# Altium PCB FMP_Proto_4.0.PcbDoc
Units mm, origin at the board's own origin, x right, y up, seen from the top; angles counter-clockwise.
Board outline 104.5 x 77.2 mm, 2 copper layers (Top Layer, Bottom Layer); 31 components, 19 nets, 114 pads, 0 vias.
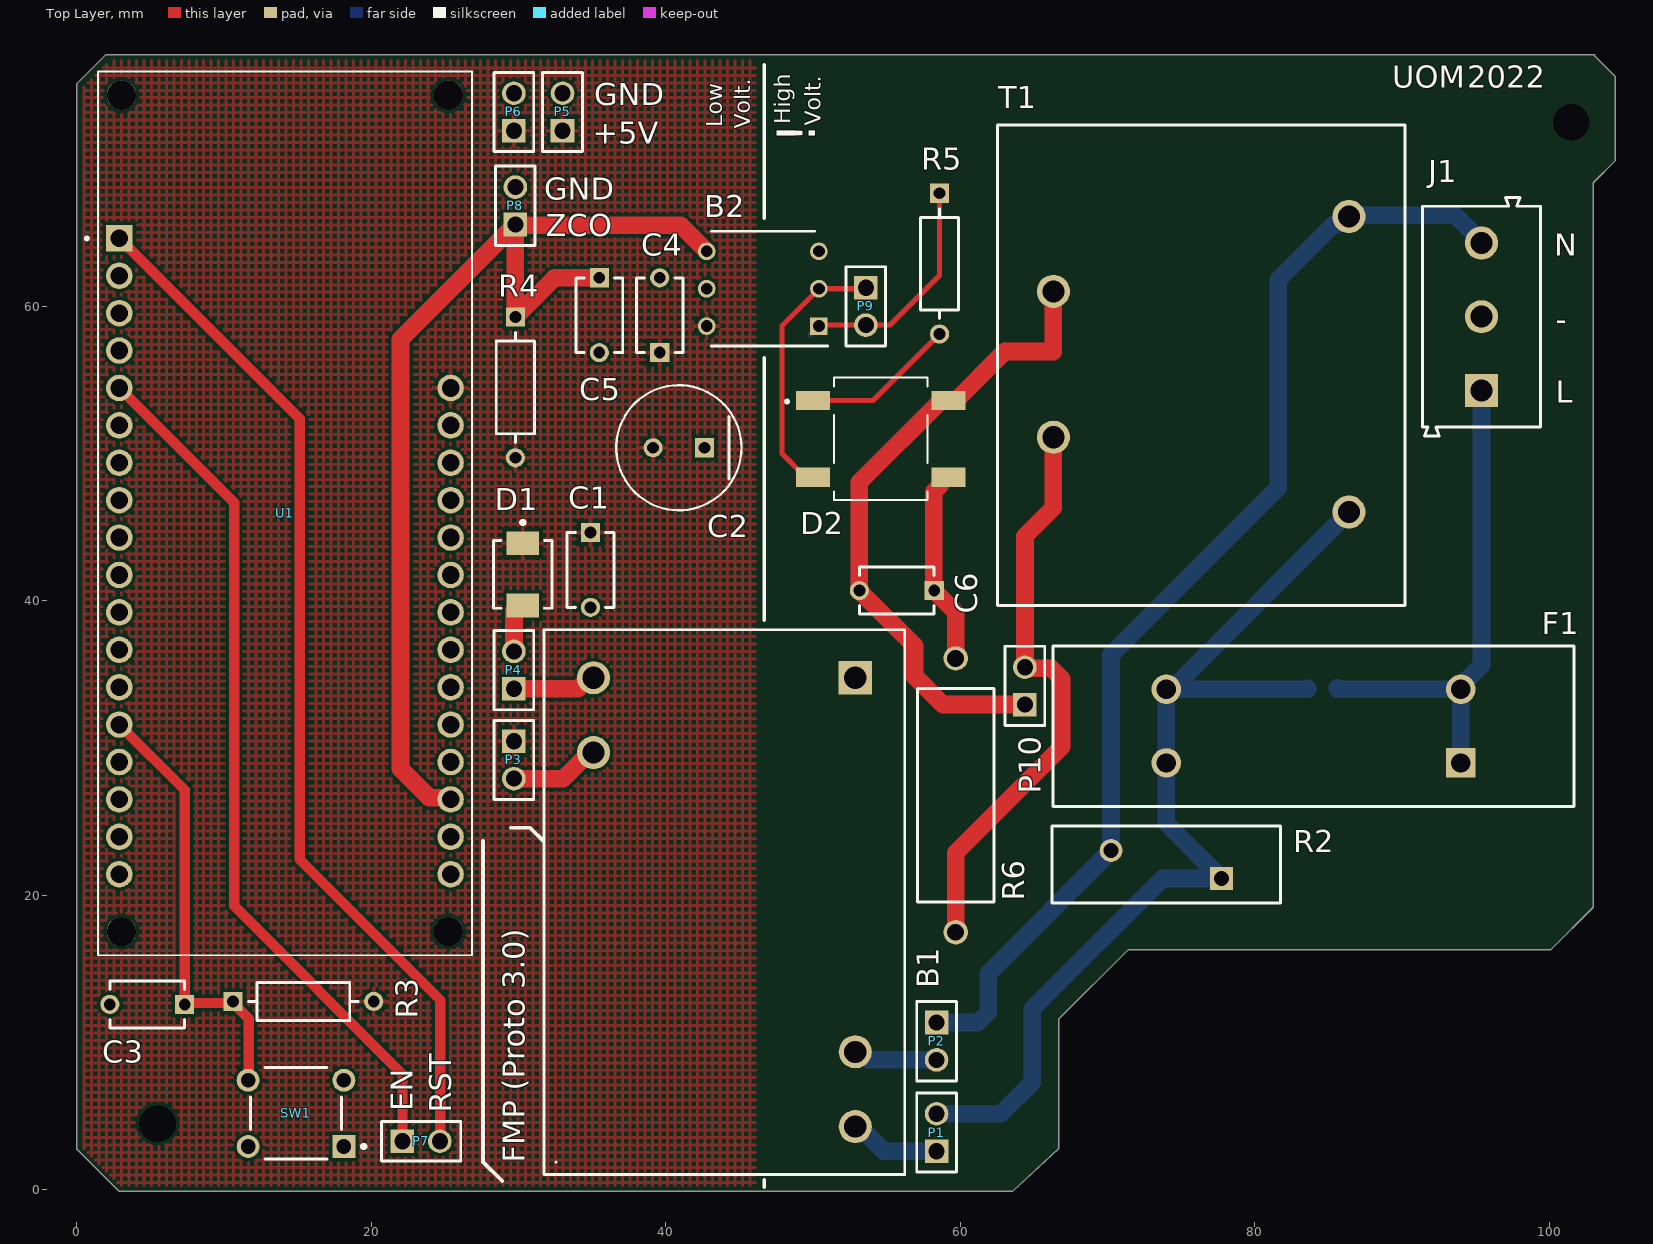
[diagram p0: Top Layer view]
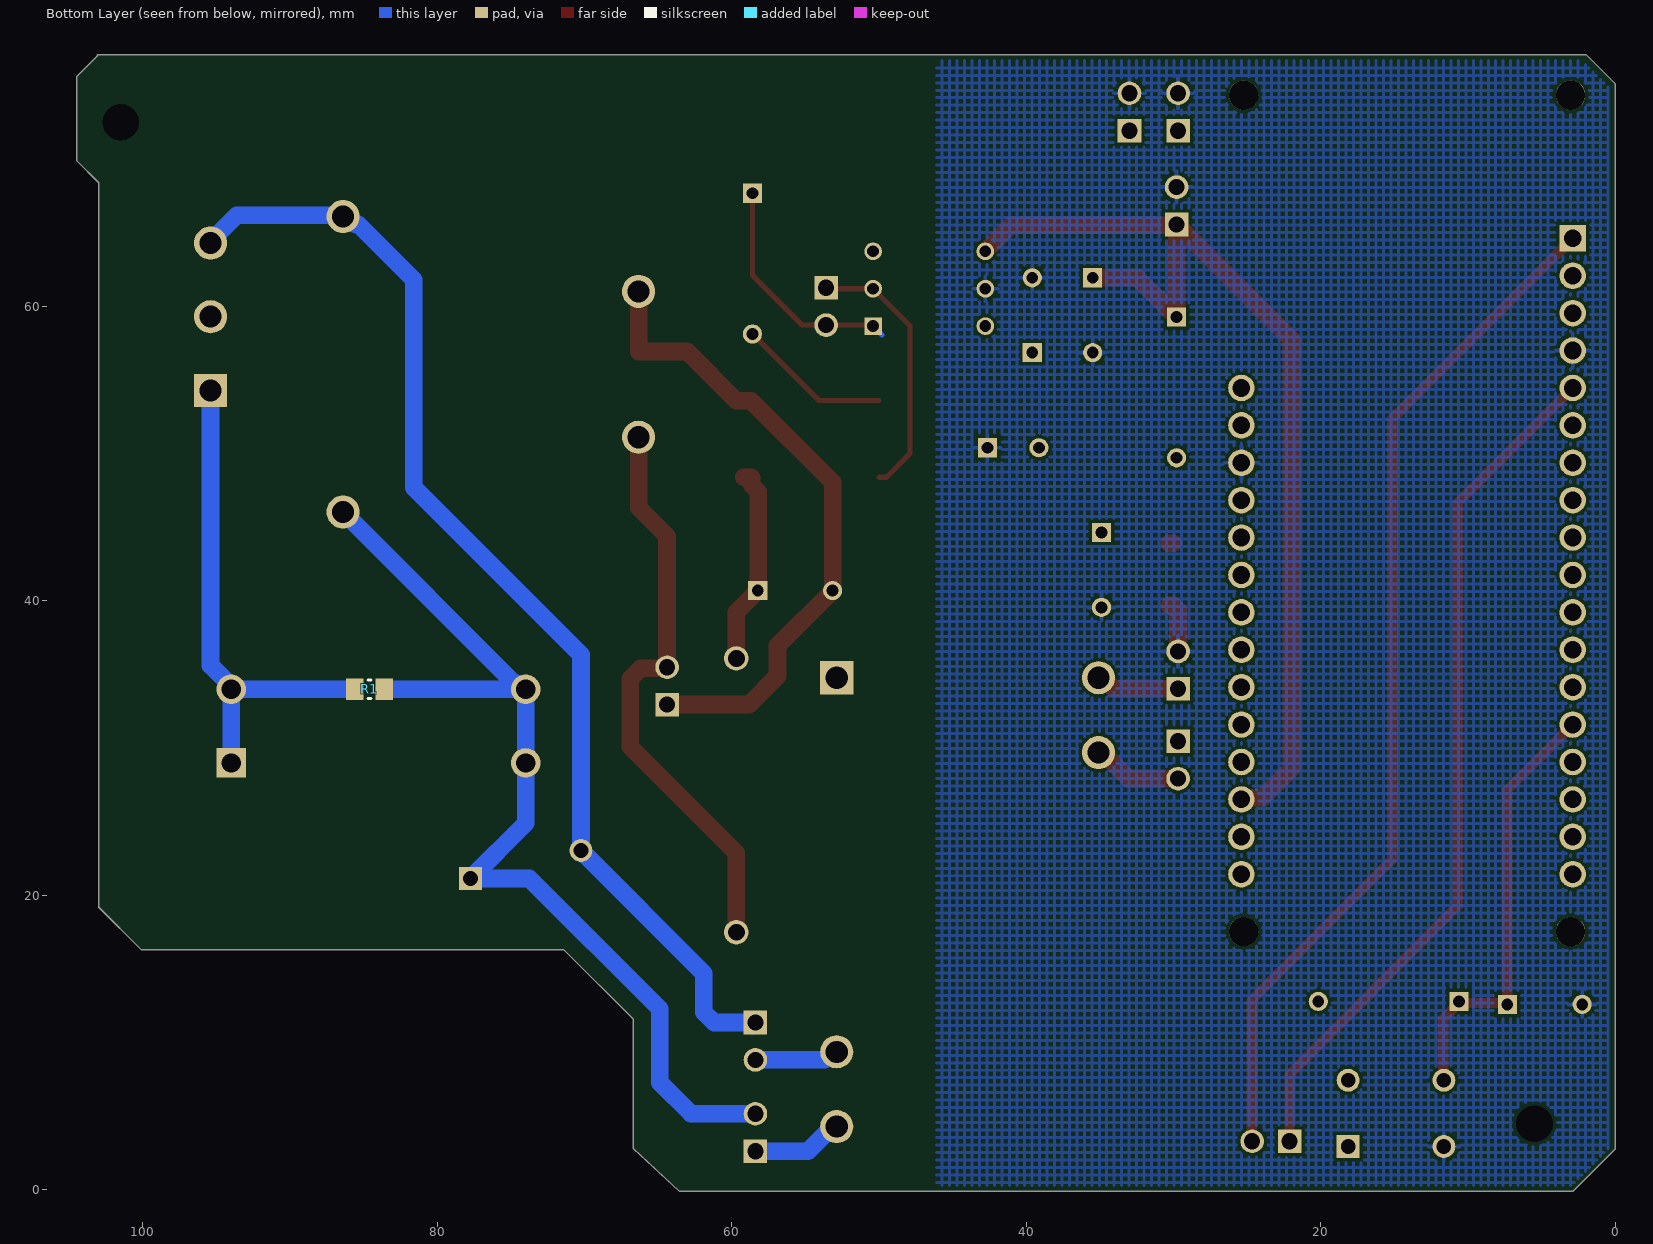
[diagram p1: Bottom Layer view, seen from below]
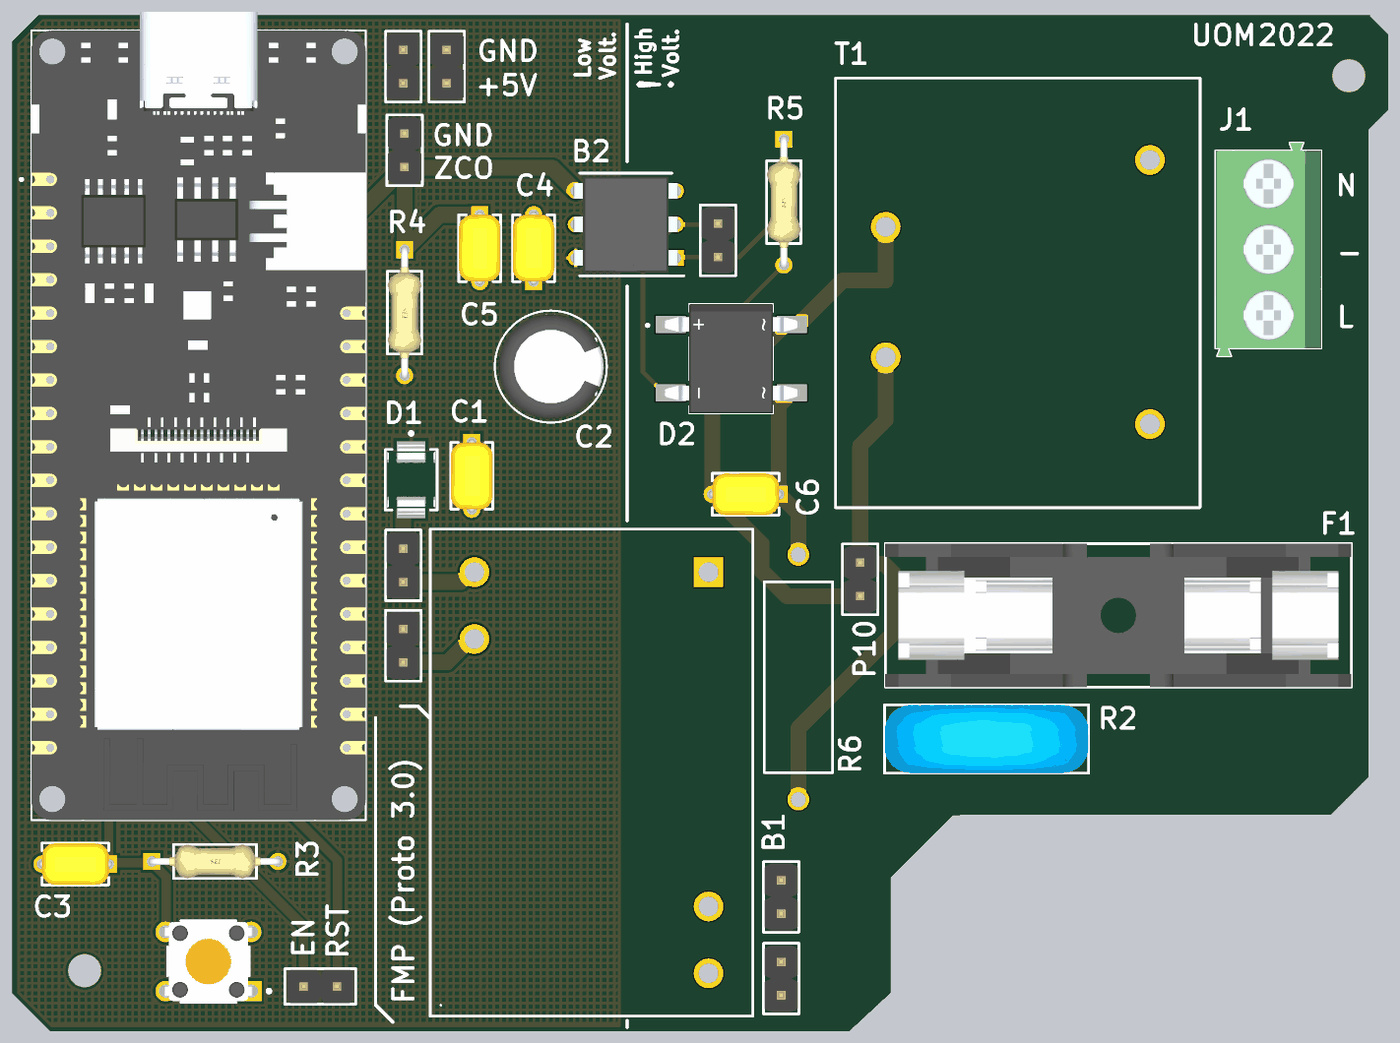
[diagram p2: 3D render of the assembled board from above, using the file's embedded part models]

## Layer stack, top to bottom
Top Solder: solder mask 0.0102, Solder Resist, Dk 3.5
Top Layer: signal copper 0.0356
Dielectric 1: dielectric 0.32, FR-4, Dk 4.8
Bottom Layer: signal copper 0.0356
Bottom Solder: solder mask 0.0102, Solder Resist, Dk 3.5

## Board outline
103,19.2 100.1,16.3 71.4,16.3 66.7,11.6 66.7,2.821 63.554,-0.1 2.9,-0.1 0,2.8 0,75.1 2,77.1 103.1,77.1 103.1,77 104.5,75.6 104.5,69.9 103,68.4

## Design rules (kind name [scope] priority, off if disabled: settings)
Clearance [All] p1: gap=0.2 ignorepadtopadclearanceinfootprint=FALSE
ComponentClearance [All] p1: gap=0.254 collisioncheckmode=3 verticalgap=0.2 showdistances=FALSE
HoleSize [All] p1: absolutevalues=TRUE maxlimit=3 minlimit=0.25 maxpercent=80.000 minpercent=20.000
HoleToHoleClearance [All] p1: gap=0.2 allowstackedmicrovias=TRUE
PolygonConnect [All] p1: connectstyle=Relief reliefconductorwidth=0.254 reliefentries=4 polygonreliefangle="90 Angle" airgapwidth=0.254
RoomDefinition FMP_Proto_4.0 [InComponentClass('FMP_Proto_4.0')] p1: confinementstyle=ConfineOut formatcopy=TRUE lockcomponents=FALSE outline 133.2,1 150.4,1 150.4,11.7 133.2,11.7
RoutingVias [All] p1: holewidth=0.711 width=1.5 viastyle="Through Hole" minholewidth=0.711 minwidth=1.5 maxholewidth=0.711 maxwidth=1.5
SilkToSilkClearance [All] p1: silktosilkclearance=0.2
SilkToSolderMaskClearance [IsPad] p1: minsilkscreentomaskgap=0.2 clearancetoexposedcopper=TRUE
SolderMaskExpansion [All] p1: expansion=0.102 istentingtop=FALSE
UnRoutedNet [All] p1: checkbadconnections=TRUE
Width [All] p1: maxlimit=1.2 minlimit=0.2 preferedwidth=0.35 minimp=50.000000 maximp=50.000000 favimp=50.000000
24 further rules are at their usual default settings.

## Components (designator, comment, footprint, x,y, rotation, side; value= is the part's Value field where it differs from the comment)
B1 "MP-LDE03-20B05" MPLDE0320B05 55.42,1.76 r90 top
B2 "VOH1016AD" DIP762W60P254L730H450Q6N 46.6,61.2 r180 top
C1 "1uF" FP-C322C104K5R5TA-MFG 34.9,42.1 r270 top
C2 "150uF" FP-EEU-FR1H101B-MFG 40.9,50.4 r180 top
C3 "0.1uF" FP-C322C104K5R5TA-MFG 4.8,12.6 r180 top
C4 "0.1uF" FP-C322C104K5R5TA-MFG 39.6,59.4 r90 top
C5 "10nF" FP-C322C104K5R5TA-MFG 35.5,59.4 r270 top
C6 "22nF" FP-C322C104K5R5TA-MFG 55.7,40.7 r180 top
D1 "SMBJ5.0A-TR" FP-SMB-MFG 30.3,41.8 r270 top
D2 "DBLS106G" DIOB_DBLS106G 54.6,51 r0 top
F1 "1A/250V" FP-0031_8231-MFG 84,31.5 r180 top
J1 "" 691111710003 95.4,59.3 r90 top
P1 "Jumper" 61300211121 58.4,3.9 r90 top
P2 "Jumper" 61300211121 58.4,10.1 r270 top
P3 "Jumper" 61300211121 29.7,29.2 r270 top
P4 "Jumper" 61300211121 29.7,35.3 r90 top
P5 "EXT_ISO-PWR" 61300211121 33,73.2 r90 top
P6 "TP1" 61300211121 29.7,73.2 r90 top
P7 "" 61300211121 23.4,3.3 r0 top
P8 "TP2" 61300211121 29.8,66.83 r90 top
P9 "TP3" 61300211121 53.6,60 r270 top
P10 "TP4" 61300211121 64.4,34.23 r90 top
R1 "Optional bypass" RESC2013X60X35ML10T20 84.6,34 r180 bottom
R2 "S14K350" FP-B72214S0301K101-0 74,22.1 r180 top
R3 "10K" FP-CF14-MFG 15.4,12.8 r0 top
R4 "270R" FP-CF14-MFG 29.8,54.5 r270 top
R5 "400R" FP-CF14-MFG 58.6,62.9 r270 top
R6 "300R" RESA90-1450X520 59.7,26.8 r90 top
SW1 "" FP-B3F-1005-MFG 14.9,5.2 r0 top
T1 "MYRRA-44121" MYRRA-44121 86.4,46.034 r90 top
U1 "DFR0654" MODULE_DFR0654 14.15,45.94 r0 top

## Footprints (in the part's own frame and the unit in brackets; to place one, negate y for a bottom-side part, rotate by r counter-clockwise, add the part's x,y. Pads: shape width x height; smd on the part's side, far side on the other; paste and mask are expansions set on the pad)
61300211121 [mm] "Pin Header, pitch 2.54 mm, THT, Vertical, single row, 2p"
  rect 1.6x1.6 hole 1.1: 1(-1.27,0)
  round 1.6 hole 1.1: 2(1.27,0)
  silkscreen extent -2.69,-1.35 2.69,1.35, body extent -2.54,-1.27 2.54,1.27, height 8.57
691111710003 [mm] "5,00mm - modular - green - Horizontal entry with pressure clamp - 10,0mm height - 03p"
  rect 2.25x2.25 hole 1.5: 1(-5,0)
  round 2.25 hole 1.5: 2(0,0) 3(5,0)
  silkscreen extent -8.1,-4 8.1,4, body extent -8.1,-4 8.1,4, height 11.05
DIOB_DBLS106G [mm]
  rect 2.3x1.3 smd: AC1(4.6,2.6) AC2(4.6,-2.6) NEG(-4.6,-2.6) POS(-4.6,2.6)
  silkscreen extent -6.45,-4.16 3.17,4.16, body extent -5.02,-4.16 5.02,4.16, height 2.93
DIP762W60P254L730H450Q6N [mm]
  rect 1.2x1.2 / inner round 1.2 / far side rect 1.2x1.2 hole 0.8: 1(-3.81,2.54)
  round 1.2 hole 0.8: 2(-3.81,0) 3(-3.81,-2.54) 4(3.81,-2.54) 5(3.81,0) 6(3.81,2.54)
  silkscreen extent -4.41,-3.9 3.5,3.9, body extent -3.96,-3.65 3.96,3.65, height 4.5
FP-0031_8231-MFG [mm]
  round 2 hole 1.3 paste-1000 mask+0: 1(-10,-2.5) 2(10,-2.5) 2(10,2.5)
  rect 2x2 hole 1.3 paste-1000 mask+0: 1(-10,2.5)
  silkscreen extent -17.7,-5.45 17.7,5.45, body extent -17.8,-5.55 17.8,5.55, height 0.25
FP-B3F-1005-MFG [mm]
  rect 1.55x1.55 hole 1 paste-1000 mask+0: 1(3.25,-2.25)
  round 1.55 hole 1 paste-1000 mask+0: 2(-3.25,-2.25) 3(3.25,2.25) 4(-3.25,2.25)
  silkscreen extent -3.1,-3.1 4.73,3.1, body extent -4.13,-3.2 4.13,3.2, height 0.25
FP-B72214S0301K101-0 [mm]
  rect 1.55x1.55 hole 1 paste-1000 mask+0: 1(-3.75,0.95)
  round 1.55 hole 1 paste-1000 mask+0: 2(3.75,-0.95)
  silkscreen extent -7.75,-2.6 7.75,2.6, body extent -7.85,-2.7 7.85,2.7, height 0.25
FP-C322C104K5R5TA-MFG [mm]
  rect 1.3x1.3 hole 0.8 paste-1000 mask+0: 1(-2.54,0)
  round 1.3 hole 0.8 paste-1000 mask+0: 2(2.54,0)
  silkscreen extent -2.54,-1.59 2.54,1.59, body extent -3.29,-1.69 3.29,1.69, height 0.25
FP-CF14-MFG [mm]
  rect 1.3x1.3 hole 0.8 paste-1000 mask+0: 1(-4.78,0)
  round 1.3 hole 0.8 paste-1000 mask+0: 2(4.78,0)
  silkscreen extent -3.73,-1.3 3.73,1.3, body extent -5.53,-1.4 5.53,1.4, height 0.25
FP-EEU-FR1H101B-MFG [mm]
  rect 1.3x1.3 hole 0.8 paste-1000 mask+0: 1(-1.75,0)
  round 1.3 hole 0.8 paste-1000 mask+0: 2(1.75,0)
  silkscreen extent -4.25,-4.25 4.25,4.25, body extent -4.35,-4.35 4.35,4.35, height 0.25
FP-SMB-MFG [mm]
  rect 1.62x2.18 smd paste+0 mask+0: 1(-2.11,0) 2(2.11,0)
  silkscreen extent -3.65,-1.97 2.3,1.97, body extent -3.02,-2.07 3.02,2.07, height 0.25
MODULE_DFR0654 [mm]
  rect 1.8x1.8 hole 1.2: 1(-11.25,18.68)
  round 1.8 hole 1.2: 2(-11.25,16.14) 3(-11.25,13.6) 4(-11.25,11.06) 5(-11.25,8.52) 6(-11.25,5.98) 7(-11.25,3.44) 8(-11.25,0.9) 9(-11.25,-1.64) 10(-11.25,-4.18) 11(-11.25,-6.72) 12(-11.25,-9.26) 13(-11.25,-11.8) 14(-11.25,-14.34) 15(-11.25,-16.88) 16(-11.25,-19.42) 17(-11.25,-21.96) 18(-11.25,-24.5) 19(11.25,-24.5) 20(11.25,-21.96) 21(11.25,-19.42) 22(11.25,-16.88) 23(11.25,-14.34) 24(11.25,-11.8) 25(11.25,-9.26) 26(11.25,-6.72) 27(11.25,-4.18) 28(11.25,-1.64) 29(11.25,0.9) 30(11.25,3.44) 31(11.25,5.98) 32(11.25,8.52)
  round 2 hole 2 unplated: ""(-11.1,-28.4) ""(-11.1,28.4) ""(11.1,-28.4) ""(11.1,28.4)
  silkscreen extent -13.55,-30 12.7,30, body extent -12.7,-30 12.7,31.4, height 7.1
MPLDE0320B05 [mm]
  round 2.25 hole 1.5: 1(2.54,2.54) 2(7.62,2.54) 3(33.02,20.32) 4(27.94,20.32)
  rect 2.25x2.25 hole 1.5: 5(33.02,2.54)
  silkscreen extent -0.72,-0.82 36.28,23.68, body extent -0.72,-0.82 36.28,23.68, height 18
MYRRA-44121 [mm]
  round 2.25 hole 1.5: 1(0,0) 2(20.066,0) 3(14.986,20.066) 4(5.08,20.066)
  silkscreen extent -6.35,-3.81 26.29,23.88, body extent -6.35,-3.81 26.29,23.88, height 23.5
RESA90-1450X520 [mm] "THD, 2-Leads, Dia 5.2mm, Body Length 14.5mm"
  round 1.65 hole 1.15: 1(-9.3,0) 2(9.3,0)
  silkscreen extent -7.25,-2.6 7.25,2.6, body extent -7.25,-2.6 7.25,2.6, height 5.2
RESC2013X60X35ML10T20 [mm] "Chip Resistor, 2-Leads, Body 2.1x1.35mm, IPC Low Density"
  rect 1.2x1.45 smd: 1(-1,0) 2(1,0)
  silkscreen extent -0.1,-0.63 0.1,0.63, body extent -1.05,-0.68 1.05,0.67, height 0.6

## Part data
B1: "This is a MP-LDE03-20B05 AC/DC PCB Mount Power Supply (PSU)", Manufacturer_Name=MULTICOMP, Manufacturer_Part_Number=MP-LDE06-20B24, Datasheet Link=https://www.farnell.com/datasheets/3155173.pdf, Geometry.Height=15.86mm
B2: "High Speed Optocouplers 1MBps Schmitt-Trigr DIP-6", Manufacturer_Name=Vishay, Mouser Part Number=78-VOH1016AD, Datasheet Link=http://www.vishay.com/docs/84896/voh1016ab.pdf, Geometry.Height=4.5mm, Manufacturer_Part_Number=VOH1016AD, Mouser Price/Stock=https://www.mouser.co.uk/ProductDetail/Vishay-Semiconductors/VOH1016AD?qs=PqoDHHvF648sjq9xbZMnUg%3D%3D
C1 C3 C4 C5 C6: library part CMP-03020-034661-1, "CAP CER 0.1UF 50V X7R RADIAL", Capacitance=100nF, Case/Package=Radial, Dielectric=X7R, Dielectric Material=Ceramic, Max Operating Temperature=125°C, Min Operating Temperature=-55°C, Package Quantity=500, Tolerance=10%, Voltage=50V, Construction=RADIAL, Depth=3.18mm, Dissipation Factor=2.5%, Height=3.18mm, Height - Seated (Max)=0.26inch, Lead Diameter=0.51mm, Lead Free="Lead Free", Lead Length=7mm, Lead Pitch=5.08mm, Lead/Base Style="Formed Leads", Length=5.08mm, Material=Ceramic, Mount="Through Hole", Number of Pins=2, Packaging=Bulk, Radiation Hardening=No, REACH SVHC="No SVHC", RoHS Compliant=Yes, Series="Golden Max™", Termination=Radial, Voltage Rating=50V, Voltage Rating (DC)=50V, Weight=0.0625lb, Width=0.125inch
C2: library part CMP-05427-000020-1, "CAP ALUM 100UF 20% 50V RADIAL", Capacitance=100uF, Case/Package=Radial, ESR (Equivalent Series Resistance)=61mR, Max Operating Temperature=105°C, Min Operating Temperature=-40°C, Package Quantity=1, Ripple Current=870mA, Tolerance=20%, Voltage Rating=50V, Contact Plating=Tin, Diameter=8mm, Features="General Purpose", Height=11.5mm, Height - Seated (Max)=0.512inch, Impedance=61mR, Lead Diameter=0.6mm, Lead Free="Lead Free", Lead Pitch=5mm, Length=11.5mm, Life (Hours)=6000Hour, Mount="Through Hole", Packaging="Tape and Reel", Radiation Hardening=No, REACH SVHC="No SVHC", RoHS Compliant=Yes, Series=FR, Termination=Radial, Voltage Rating (DC)=50V
D1: library part CMP-12225-000019-1, "TVS DIODE 5V 13.4V SMB", Breakdown Voltage=6.4V, Clamping Voltage=14.4V, Manufacturer=STMicroelectronics, Max Junction Temp=+150°C, Package=SMB, Peak Pulse Current=275A, Peak Pulse Power=600W, Reverse Standoff Voltage=5V, Temperature="-55°C to +150°C", Temperature Range Low=-55°C, Automotive=No, Category=Diode, ComponentLink2Description=Datasheet, ComponentLink2URL=https://www.st.com/resource/en/datasheet/smbj.pdf, Device Class L1="Circuit Protection", Device Class L2="TVS Diodes", Device Class L3=unset, Digikey Description="TVS DIODE 5V 13.4V SMB", Direction=Unidirectional, Height=2.65mm, Lead Free=Yes, Manufacturer Part Number=SMBJ5.0A-TR, Mouser Description="SMBJ Series 600 W 5 V Uni Directional SMT TVS Diode - DO-214AA", Number Of Channels=1, Octopart=https://octopart.com/smbj5.0a-tr-stmicroelectronics-347079, RoHS=TRUE, Standoff Height=0.05mm, Temperature Range High=+150°C
D2: "1A, 800V, Standard Bridge Rectifier", Package="DBLS Taiwan Semiconductor", Availability="In Stock", Check_prices=https://www.snapeda.com/parts/DBLS106G/Taiwan+Semiconductor/view-part/?ref=eda, MF="Taiwan Semiconductor", MP=DBLS106G, Price=None, Purchase-URL=https://pricing.snapeda.com/search/part/DBLS106G/?ref=eda, SnapEDA_Link=https://www.snapeda.com/parts/DBLS106G/Taiwan+Semiconductor/view-part/?ref=snap
F1: library part CMP-26292-000005-1, "FUSE BLOK CARTRIDGE 600V 16A PCB", Ambient Temperature Range High=+85°C, Ambient Temperature Range Low=-40°C, Fuse Current=16A, Manufacturer=Schurter, Manufacturer Part Number=0031.8231, Package=0, Voltage Rating Ac=500V, Voltage Rating Dc=600V, Automotive=No, Category=Fuse, ComponentLink2Description=Datasheet, ComponentLink2URL=https://www.schurter.com/en/datasheet/typ_OGD.pdf, Conn Orientation=Horizontal, Device Class L1="Circuit Protection", Device Class L2="Fuse Holders", Device Class L3=unset, Digikey Description="FUSE BLOK CARTRIDGE 600V 16A PCB", Height=12.7mm, Lead Free=Yes, Mouser Description="Fuse Holder OGD FUSEHOLDER 5X20/6.3X32", Number Of Fuses=1, Octopart=https://octopart.com/0031.8231-schurter-8659, RoHS=TRUE, Standoff Height=0.7mm
J1: library part CMP-1502-03263-1, "Series 111 - 5.00 mm Horizontal Entry Modular with Pressure Clamp WR-TBL, 3 pin", Manufacturer="Wurth Elektronik", Operating Temperature=-40to105degC, Package Reference=691111710003, Datasheet URL=http://katalog.we-online.de/em/datasheet/6911117100xx.pdf, Manufacturer URL=http://www.we-online.de, Mounting Technology=THT, Packaging=Box, Part Number=691111710003, Pin Number=3, Pitch=5.00mm, Publisher=WurthElektronik
P1 P2 P3 P4 P5 P6 P7 P8 P9 P10: library part CMP-1712-00002-4, "THT Vertical Pin Header WR-PHD, Pitch 2.54 mm, Single Row, 2 pins", Contact Resistance=20mOhm, Manufacturer="Wurth Elektronik", Operating Temperature=-40to105degC, Package Reference=61300211121, Rated Current=3A, Withstanding Voltage=500VAC, Working Voltage=250VAC, Datasheet URL=https://katalog.we-online.de/em/datasheet/6130xx11121.pdf, Gender=Male, Manufacturer URL=http://www.we-online.de, Mounting Technology=THT, Orientation=Vertical, Packaging=Bag, Part Number=61300211121, Pin Number=2, Pitch=2.54mm, Publisher=WurthElektronik, Row Number=Single
R1: library part CMP-2100-03673-1, "Chip Resistor, 0 Ohm, Jumper", Case Code (Imperial)=0805, Case Code (Metric)=2012, Manufacturer=Yageo, Max Operating Temperature=155degC, Min Operating Temperature=-55degC, Package Description="2-Pin Surface Mounted Device, Body 2 x 1.25 mm", Power Rating=125mW, Resistance=0mOhm, Temperature Coefficient=200ppm/degreesC, Tolerance=5%, Voltage Rating=150V, Case/Package=0805, Composition=ThickFilm, Contact Plating=Tin, Datasheet URL=http://www.yageo.com/NewPortal/yageodocoutput?fileName=/pdf/R-Chip/PYu-RC_Group_51_RoHS_L_5.pdf, Datasheet Version="Rev. 5, 10/2016", Depth=1.25mm, Height=0.5mm, Lead Free=LeadFree, Length=2mm, Manufacturer URL=http://www.yageo.com/, Military Standard=Not, Number of Pins=2, Package Reference=0805, Packaging=TapeandReel, Radiation Hardening=No, REACH SVHC=Unknown, RoHSCompliant=true, Termination=SMD/SMT, Voltage Rating (DC)=150V, Width=1.25mm
R2: library part CMP-10618-000016-1, "VARISTOR 560V 50A DISC 14MM", Capacitance=300pF, Clamping Current=50A, Clamping Voltage=775V, Max Operating Temperature=85°C, Max Surge Current=4.5kA, Max Voltage Rating (AC)=300V, Max Voltage Rating (DC)=385V, Min Operating Temperature=-40°C, Package Quantity=500, Tolerance=10%, Varistor Voltage=470V, Depth=5.2mm, Diameter=14mm, Energy=76J, Lead Length=30mm, Lead Pitch=7.5mm, Lead/Base Style=Radial, Mount=Radial, Packaging=Bulk, REACH SVHC="No SVHC", RoHS Compliant=Yes, Series=StandardD, Thickness=5.2mm, Voltage Rating (AC)=300V, Voltage Rating (DC)=385V, Voltage Tolerance=10%, Weight=0.141096oz
R3 R4 R5: library part CMP-26528-000003-1, "RES 7.5K OHM 1/4W 5% AXIAL", Case/Package=Axial, Max Operating Temperature=155°C, Max Power Dissipation=250mW, Min Operating Temperature=-55°C, Resistance=7.5kR, Resistor Type="Carbon Film", Temperature Coefficient=-400ppm/°C, Tolerance=5%, Contact Plating=Tin, Diameter=2.3mm, Features="Flame Retardant Coating", Lead Free="Lead Free", Length=0.256inch, Mount="Through Hole", Number of Terminations=2, Packaging="Tape and Reel", Power Rating=250mW, Radiation Hardening=No, RoHS Compliant=Yes, Series=CF
R6: library part CMP-1678-00001-6, "Axial Resistor, power metal; THT; 1,5kΩ; 2W; ±5%; Ø4x11mm; 350ppm/°C", Manufacturer=Ohmite, Max Operating Temperature="275 degC", Min Operating Temperature="-55 degC", Package Quantity=10, Voltage Rating="100 mV", ComponentLink1Description="Manufacturer URL", ComponentLink1URL=http://www.ohmite.com/, ComponentLink2Description=Datasheet, ComponentLink2URL=http://www.ohmite.com/cat/res_10.pdf, DatasheetVersion=06/2015, Length="14.5 mm", Mount="Through Hole", Mounting Technology="Through Hole", PackageDescription="2-Pin Axial Lead, Dia 5.2 mm, Body Length 14.5 mm", PackageReference="Axial Resistor", Packaging=Bulk, Pins=2, REACH SVHC=Unknown, RoHSCompliant=true
SW1: library part CMP-08834-000043-1, "SWITCH TACTILE SPST-NO 0.05A 24V", Actuator Color=Orange, Contact Current Rating=50mA, Contact Resistance=100mR, Max Operating Temperature=70°C, Max Voltage Rating (DC)=24V, Min Operating Temperature=-25°C, Operating Force=2.55N, Package Quantity=1500, Ratings=IP00, Actuator Length=0.9mm, Actuator Type=Standard, Contact Material=Gold, Contact Plating=Silver, Current Rating=50mA, Depth=6mm, Electrical Life=300000Cycles, Height=4.3mm, Illumination Type=Non-Illuminated, Lead Free="Lead Free", Length=6mm, Max Current Rating=50mA, Mechanical Life=100000Cycles, Mount="Through Hole", Number of Poles=1, Orientation=Straight, Packaging=Bag, Series=B3F, Switch Function=Off-Mom, Switch Travel=0.25mm, Termination="PC Pins", Throw Configuration=SPST, Voltage Rating (DC)=24V, Weight=0.25g, Width=6mm
T1: "This is a MYRRA-44121 PCB Transformer (230 VAC to 6 VAC)", Manufacturer_Name=MULTICOMP, Manufacturer_Part_Number=MP-LDE06-20B24, Datasheet Link=https://www.farnell.com/datasheets/3155173.pdf, Geometry.Height=15.86mm
U1: "ESP32-E series Transceiver; 802.11 b/g/n/d/e/i/k/r (Wi-Fi, WiFi, WLAN), Bluetooth Smart 4.x Low Energy (BLE) Evaluation Board", Package=None, Availability="In Stock", Check_prices=https://www.snapeda.com/parts/DFR0654/DFRobot/view-part/?ref=eda, MF=DFRobot, MP=DFR0654, Price=None, Purchase-URL=https://pricing.snapeda.com/search/part/DFR0654/?ref=eda, SnapEDA_Link=https://www.snapeda.com/parts/DFR0654/DFRobot/view-part/?ref=snap

## Free pads (board coordinates)
  round 1.524 hole 2.5 mask+0.5: 2(5.5,4.5) 2(101.5,72.5)

## Nets (pads, with @x,y where several pads share a name; then routed paths per layer and width w, separated by ;. In a path a pad name is that pad's centre, name@x,y a point inside that pad or via, vN(x,y) a via of type N, cw(c..) or ccw(c..) an arc to the next point about the centre after c; other vN are vias at no path point)
+5V_ISO: B2.6 C1.1 C2.2 C4.1 D1.1 P3.1 P5.1 P6.1 R3.2 R4.2 U1.32 | length 0.4
  Top Layer w1.2: D1.1@30.02,43.91 D1.1 ; C2.2@39.131,50.381 C2.2 ; C4.1 C4.1@39.65,56.81
AC_L: F1.2 P1.2 R1.2 R2.1 T1.1 | length 70.3
  Bottom Layer w1.2: P1.2 62.77,5.17 64.9,7.3 64.9,12.3 73.75,21.15 R2.1 74,24.9 74,29 F1.2@74,34 ; R1.2@83.6,34.05 R1.2 F1.2@74,34 ; T1.1 74.766,34.4 74.616,34.4 74.216,34 F1.2@74,34
AC_N: J1.3 P2.1 R2.2 T1.2 | length 78.8
  Bottom Layer w1.2: P2.1@58.6,11.17 P2.1 61.197,11.37 61.9,12.073 61.9,14.7 R2.2 70.25,36.35 81.6,47.7 81.6,61.8 85.375,65.575 85.591,65.575 86.196,66.18 93.62,66.18 J1.3@95.765,64.035
EN: P7.1 U1.5 | length 59.1
  Top Layer w0.7: U1.5 10.7,46.66 10.7,19.3 22.13,7.87 P7.1
GND: B2.2 D2.NEG P9.1 | length 18.2
  Top Layer w0.35: D2.NEG 49.5,48.4 47.9,50 47.9,58.69 B2.2 53.53,61.2 P9.1
GND_ISO: B2.5 C1.2 C2.1 C3.2 C4.2 C5.2 D1.2 P4.2 P5.2 P6.2 P8.2 SW1.2 U1.4 U1.30 | length 3.5
  Top Layer w1.2: P4.2 29.7,39.37 30.02,39.69 D1.2
IO0: C3.1 R3.1 SW1.4 U1.14 | length 30.3
  Top Layer w0.7: U1.14 7.34,27.16 C3.1 7.44,12.7 10.72,12.7 10.92,12.5 10.92,12.4 11.7,11.62 SW1.4@11.7,7.112
NetB1_1: B1.1 P1.1 | length 6.2
  Bottom Layer w1.2: B1.1 53.164,4.3 54.834,2.63 P1.1
NetB1_2: B1.2 P2.2 | length 5.7
  Bottom Layer w1.2: B1.2 53.164,9.38 53.714,8.83 P2.2
NetB1_3: B1.3 P4.1 | length 5.7
  Top Layer w1.2: P4.1 34.066,34.03 34.816,34.78 B1.3
NetB1_4: B1.4 P3.2 | length 6.1
  Top Layer w1.2: P3.2 33.046,27.93 34.816,29.7 B1.4
NetC6_1: C6.1 D2.AC2 R6.2 | length 13.6
  Top Layer w1.2: D2.AC2 58.7,48.4 58.65,48.35 58.65,47.85 58.2,47.4 58.2,40.74 C6.1 59.7,39.24 R6.2
NetD2_POS: D2.POS R5.2 | length 10.5
  Top Layer w0.35: D2.POS 54.08,53.6 R5.2
NetF1_1: F1.1 J1.1 R1.1 | length 34.4
  Bottom Layer w1.2: R1.1@85.6,34.1 R1.1 F1.1@94,34 ; F1.1@94,29 F1.1@94,34 ; J1.1 95.4,35.616 94,34.216 F1.1@94,34
NetP7_2: P7.2 U1.1 | length 70.5
  Top Layer w0.7: U1.1 15.16,52.36 15.16,22.44 24.7,12.9 P7.2@24.7,3.187
T_OUT_1: P10.2 R6.1 T1.4 | length 39.4
  Top Layer w1.2: R6.1 59.7,22.9 66.9,30.1 66.9,34.721 66.197,35.423 64.477,35.423 P10.2 64.4,44.4 66.334,46.334 T1.4
T_OUT_2: C6.2 D2.AC1 P10.1 T1.3 | length 44
  Top Layer w0.35: P10.1@64.33,33.03 P10.1
  Top Layer w1.2: P10.1 58.84,32.96 56.9,34.9 56.9,36.96 C6.2 53.16,48.06 58.7,53.6 D2.AC1 59.7,53.6 63.034,56.934 66.334,56.934 T1.3
ZCO: B2.1 P9.2 R5.1 | length 16.1
  Top Layer w0.35: B2.1 50.48,58.73 P9.2 55.23,58.73 58.6,62.1 R5.1
  Bottom Layer w0.35: 49.8,58.05 B2.1
ZCO-ISO: B2.4 C5.1 P8.1 R4.1 U1.21 | length 71.3
  Top Layer w1.2: U1.21 25.285,26.635 23.965,26.635 22,28.6 22,57.76 P8.1 ; C5.1 32.46,61.94 R4.1 P8.1 ; B2.4 41.03,65.5 29.86,65.5 P8.1
pads on no net: B1.5 B2.3 J1.2 SW1.1 SW1.3 U1. U1.2 U1.3 U1.6 U1.7 U1.8 U1.9 U1.10 U1.11 U1.12 U1.13 U1.15 U1.16 U1.17 U1.18 U1.19 U1.20 U1.22 U1.23 U1.24 U1.25 U1.26 U1.27 U1.28 U1.29 U1.31

## Polygon pours and split planes (outlines as drawn)
GND_ISO on Bottom Layer "GND_ISO_L02_P000" (hatched 90Degree grid 0.508 track 0.203, pour order 0): 46.1,76.7 2.3,76.7 0.5,74.9 0.5,2.8 3,0.3 46.1,0.3
+5V_ISO on Top Layer "+5V_ISO_L01_P001" (hatched 90Degree grid 0.508 track 0.203, pour order 1): 2.3,76.7 0.5,74.9 0.5,2.8 3,0.3 46.1,0.3 46.1,76.7

## Silkscreen, mask and mechanical layers (free items; w line width, h text height)
Top Overlay:
  lines w0.254: 27.6,23.7 27.6,1.9 28.9,0.6 ; 29.5,24.6 30.8,24.6 31.7,23.7 ; 46.7,0.2 46.7,0.7 ; 46.7,38.7 46.7,56.5 ; 46.7,66 46.7,76.4
  text "UOM" at 89.354,74.854 h1.52
  text "2022" at 94.454,74.854 h1.52
  text "GND" at 35.154,73.654 h1.52
  text "High" at 48.479,72.354 h1.1 r90
  text "Volt." at 50.546,72.254 h1.1 r90
  text "Low" at 43.846,72.154 h1.1 r90
  text "Volt." at 45.746,72.054 h1.1 r90
  text "+5V" at 35.054,71.054 h1.52
  text "!" at 50.146,71.054 h2.6 r90
  text "GND" at 31.754,67.254 h1.52
  text "ZCO" at 31.854,64.754 h1.52
  text "N" at 100.354,63.454 h1.52
  text "-" at 100.454,58.392 h1.52
  text "L" at 100.454,53.454 h1.52
  text "EN" at 22.846,5.354 h1.52 r90
  text "RST" at 25.446,5.254 h1.52 r90
  text "FMP (Proto 3.0)" at 30.446,1.854 h1.52 r90